# EAGLE board Spring12_6_Node (EAGLE 6.1)
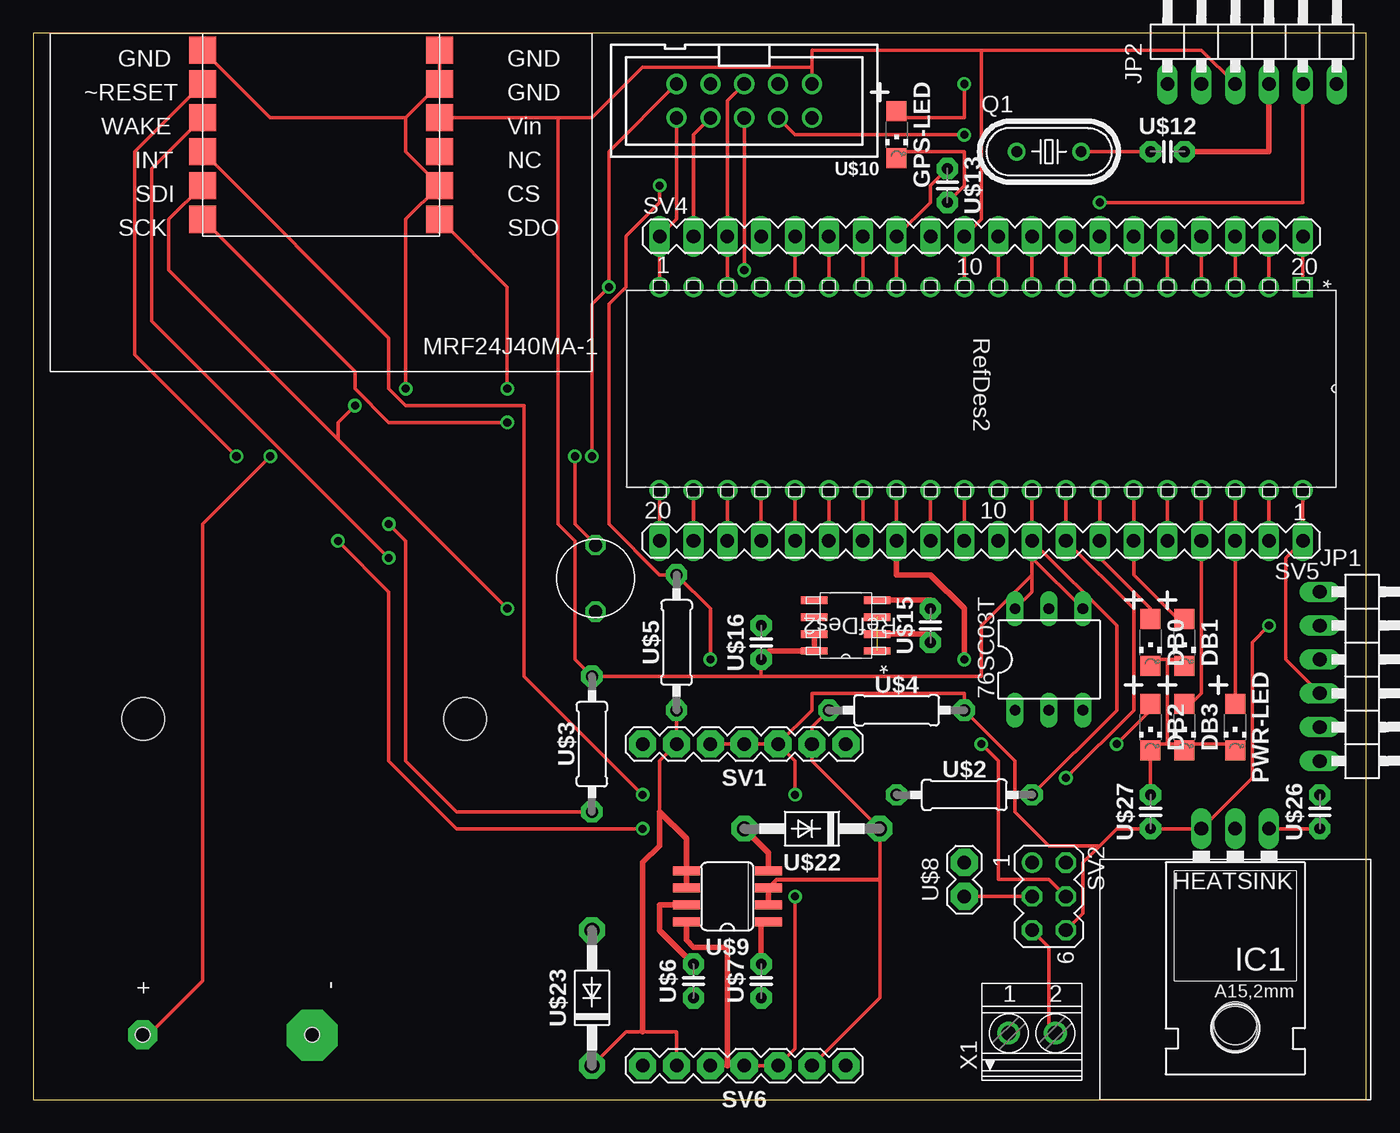
[diagram p0: board, top side]
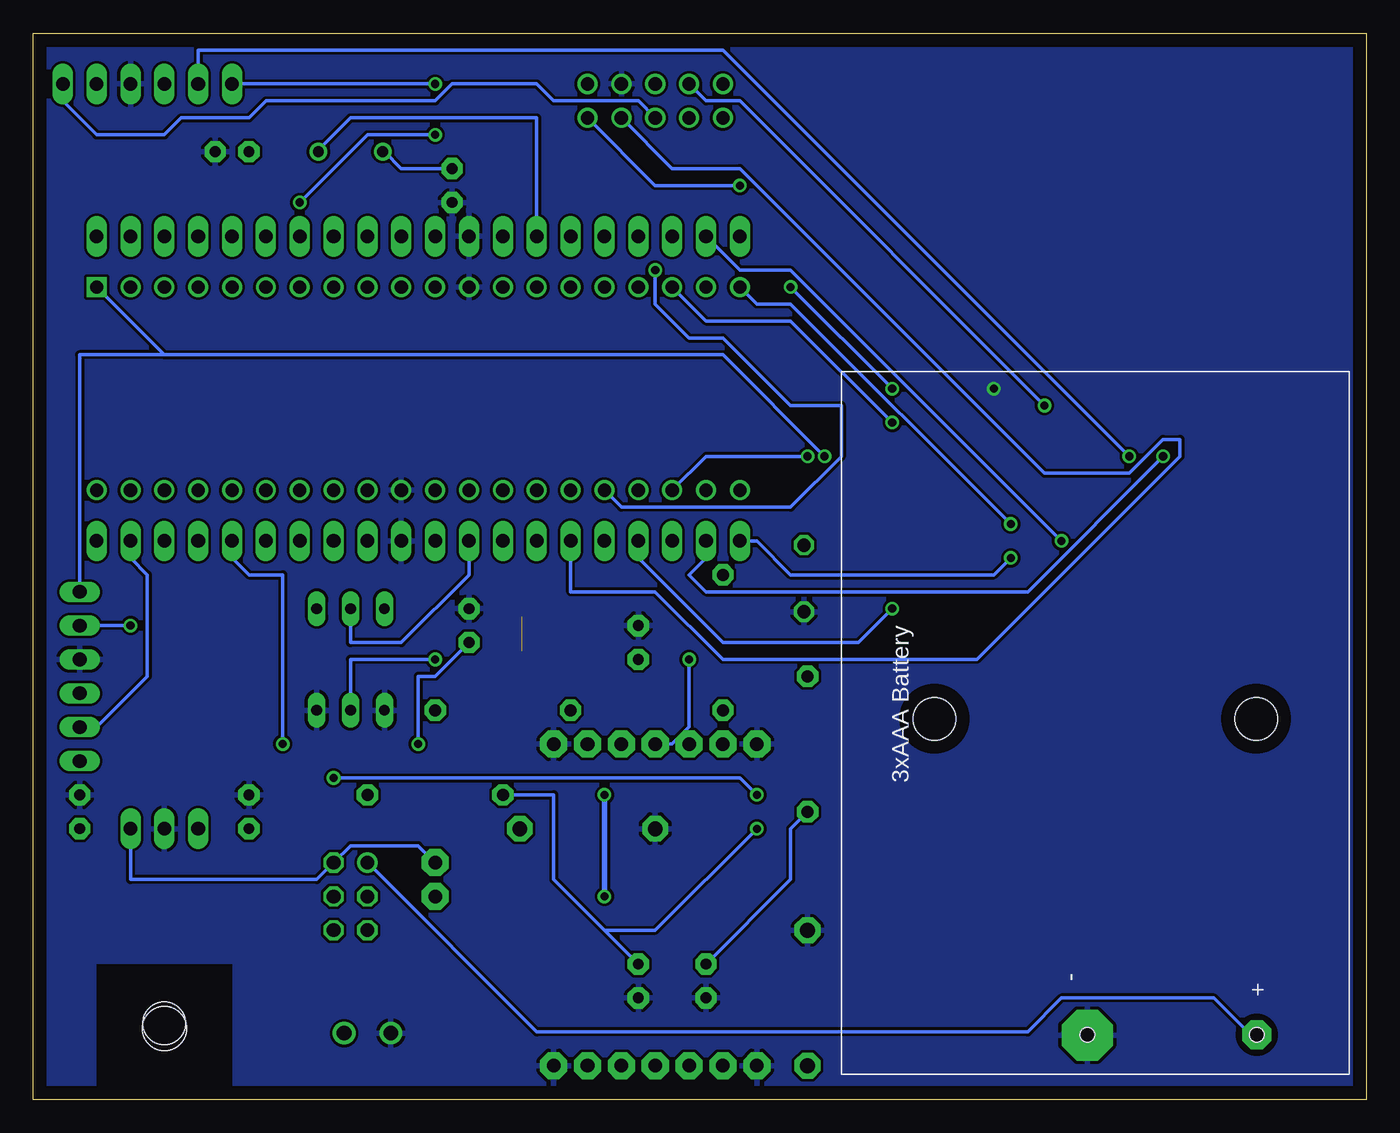
[diagram p1: board, bottom side, seen from below]

Size 100 x 80 mm. Coordinates in mm from the lower left corner, seen from the top.
Outline: 0,0 100,0 100,80 0,80 0,0
Copper layers (1*16): Top 0.035mm / dielectric 1.5mm / Bottom 0.035mm
Design rules: minimum track width 10mil, minimum drill 24mil, track to track 8mil, track to pad 8mil, pad to pad 8mil, via to via 8mil, smd to smd 8mil, copper to edge 40mil, drill to drill 8mil, minimum pad ring 10mil, minimum via ring 8mil, stop-mask expansion 4mil, vias tented up to drill 0mil, thermal gap 10mil
tRestrict: area 17.8,76.2 to 25.4,80; area 44.5,47 to 97.8,59.7; area 80,0 to 100.3,17.8; area 50.8,12.7 to 53.3,17.8; area 74.9,68.6 to 77.5,73.7; area 59.7,33 to 62.2,38.1; area 72.4,30.5 to 80,35.6
bRestrict: area 85.1,1.3 to 95.2,10.2
vRestrict: area 1.3,54.6 to 41.9,80; area 39.4,36.8 to 44.5,41.9; area 47,30.5 to 49.5,38.1; area 40.6,22.9 to 43.2,30.5; area 40.6,3.8 to 43.2,11.4; area 54.6,19.1 to 62.2,21.6; area 66,21.6 to 73.7,24.1; area 61,27.9 to 68.6,30.5; area 43.2,71.1 to 63.5,78.7; area 82.6,26.7 to 87.6,29.2; area 82.6,33 to 87.6,35.6; area 88.9,26.7 to 91.4,29.2

## Footprints (pad centres in the part's own frame; a part is rotated, then mirrored left to right if it is on the bottom)
DIL06 = drill 0.813 long: 1 -2.54,-3.81; 2 0,-3.81; 3 2.54,-3.81; 4 2.54,3.81; 5 0,3.81; 6 -2.54,3.81
LED1206 = smd 1.5 x 1.5: A 0,-1.75; C 0,1.75
78XXL = drill 1.016 long: GND 0,-3.81; IN -2.54,-3.81; OUT 2.54,-3.81 | hole 3.302: 0,11.176
1X06/90 = drill 1.016 long: 1 -6.35,-3.81; 2 -3.81,-3.81; 3 -1.27,-3.81; 4 1.27,-3.81; 5 3.81,-3.81; 6 6.35,-3.81
HC49U-V = drill 0.813: 1 -2.413,0; 2 2.413,0
MA07-1 = drill 1.016 pad 2.032 octagon: 1 -7.62,0; 2 -5.08,0; 3 -2.54,0; 4 0,0; 5 2.54,0; 6 5.08,0; 7 7.62,0
MA03-2 = drill 1.016: 1 -2.54,-1.27 | drill 1.016 octagon: 2 -2.54,1.27; 3 0,-1.27; 4 0,1.27; 5 2.54,-1.27; 6 2.54,1.27
MA20-1 = drill 1.016 long: 1 -24.13,0; 2 -21.59,0; 3 -19.05,0; 4 -16.51,0; 5 -13.97,0; 6 -11.43,0; 7 -8.89,0; 8 -6.35,0; 9 -3.81,0; 10 -1.27,0; 11 1.27,0; 12 3.81,0; 13 6.35,0; 14 8.89,0; 15 11.43,0; 16 13.97,0; 17 16.51,0; 18 19.05,0; 19 21.59,0; 20 24.13,0
PDIP40_600MC = drill 0.991 square: 1 -15.24,48.26 | drill 0.991: 2 -15.24,45.72; 3 -15.24,43.18; 4 -15.24,40.64; 5 -15.24,38.1; 6 -15.24,35.56; 7 -15.24,33.02; 8 -15.24,30.48; 9 -15.24,27.94; 10 -15.24,25.4; 11 -15.24,22.86; 12 -15.24,20.32; 13 -15.24,17.78; 14 -15.24,15.24; 15 -15.24,12.7; 16 -15.24,10.16; 17 -15.24,7.62; 18 -15.24,5.08; 19 -15.24,2.54; 20 -15.24,0; 21 0,0; 22 0,2.54; 23 0,5.08; 24 0,7.62; 25 0,10.16; 26 0,12.7; 27 0,15.24; 28 0,17.78; 29 0,20.32; 30 0,22.86; 31 0,25.4; 32 0,27.94; 33 0,30.48; 34 0,33.02; 35 0,35.56; 36 0,38.1; 37 0,40.64; 38 0,43.18; 39 0,45.72; 40 0,48.26
R-1/4W = drill 0.9 pad 1.6 octagon: 1 -5.08,0; 2 5.08,0
C2.5-5 = drill 0.813 pad 1.6 octagon: 1 -1.27,0; 2 1.27,0
MA02-1 = drill 1.016 pad 2.032 octagon: 1 -1.27,0; 2 1.27,0
SO08 = smd 0.66 x 2.032: 1 -1.905,-3.073; 2 -0.635,-3.073; 3 0.635,-3.073; 4 1.905,-3.073; 5 1.905,3.073; 6 0.635,3.073; 7 -0.635,3.073; 8 -1.905,3.073
2510-6002 = drill 1 pad 1.422: 1 -5.08,-1.27; 2 -5.08,1.27; 3 -2.54,-1.27; 4 -2.54,1.27; 5 0,-1.27; 6 0,1.27; 7 2.54,-1.27; 8 2.54,1.27; 9 5.08,-1.27; 10 5.08,1.27
PCB12 = smd 2.032 x 2.032: 1 -8.89,8.89; 2 -8.89,6.35; 3 -8.89,3.81; 4 -8.89,1.27; 5 -8.89,-1.27; 6 -8.89,-3.81; 7 8.89,-3.81; 8 8.89,-1.27; 9 8.89,1.27; 10 8.89,3.81; 11 8.89,6.35; 12 8.89,8.89
SOIC8-N_MC = smd 1.981 x 0.559: 1 -2.362,1.905; 2 -2.362,0.635; 3 -2.362,-0.635; 4 -2.362,-1.905; 5 2.362,-1.905; 6 2.362,-0.635; 7 2.362,0.635; 8 2.362,1.905
2479-BATTERY = drill 1.1 pad 3.81 octagon: P$1 24.384,-7.01 | drill 1.1 pad 2.184 octagon: P$2 24.359,-19.736 | hole 3.2: 0.635,-19.685; 0.635,4.445 | hole 1.1: 24.359,-7.01; 24.359,-19.736
1N5817 = drill 1.118 pad 1.93 octagon: A 5.08,0; C -5.08,0
EVQ-11U05R = drill 1 octagon: P$1 -1,3.5; P$2 -1,-1.5
7-361-BA = hole 3.2: -2.54,-3.175
1751248 = drill 1.1 pad 1.7: 1 -1.75,-0.1; 2 1.75,-0.1

## Placement (x,y rotation side)
76SC03T  I2C Select  [DIL06]  76.2,33.02 0 top
DB0  LED-SMD-1206  [LED1206]  83.82,34.29 180 top
DB1  LED-SMD-1206  [LED1206]  86.36,34.29 180 top
DB2  LED-SMD-1206  [LED1206]  83.82,27.94 180 top
DB3  LED-SMD-1206  [LED1206]  86.36,27.94 180 top
GPS-LED  LED-SMD-1206  [LED1206]  64.77,72.39 180 top
IC1  L78S05CV  [78XXL]  90.17,16.51 180 top
JP1  PICKIT  [1X06/90]  100.33,31.75 270 top
JP2  GPSR  [1X06/90]  91.44,80.01 0 top
PWR-LED  LED-SMD-1206  [LED1206]  90.17,27.94 180 top
Q1  20MHz  [HC49U-V]  76.2,71.12 0 top
SV1  I2C BUS  [MA07-1]  53.34,26.67 180 top
SV2  PWR CNTL  [MA03-2]  76.2,15.24 270 top
SV4  [MA20-1]  71.12,64.77 0 top
SV5  [MA20-1]  71.12,41.91 180 top
SV6  I2C BUS  [MA07-1]  53.34,2.54 180 top
U$1  PIC18F45J10-X/P  [PDIP40_600MC]  46.99,45.72 270 top
U$2  1k  [R-1/4W]  69.85,22.86 0 top
U$3  1k  [R-1/4W]  41.91,26.67 90 top
U$4  330  [R-1/4W]  64.77,29.21 0 top
U$5  330  [R-1/4W]  48.26,34.29 90 top
U$6  100pF  [C2.5-5]  49.53,8.89 90 top
U$7  100pF  [C2.5-5]  54.61,8.89 90 top
U$8  CURRENT  [MA02-1]  69.85,16.51 90 top
U$9  PCA9600SO8  [SO08]  52.07,15.24 90 top
U$10  DEBUG  [2510-6002]  53.34,74.93 180 top
U$11  MRF24J40MA  [PCB12]  21.59,69.85 0 top
U$12  18pF  [C2.5-5]  85.09,71.12 0 top
U$13  18pF  [C2.5-5]  68.58,68.58 270 top
U$14  MCP1725-XXXXX/SN  [SOIC8-N_MC]  60.96,35.56 180 top
U$15  10uF  [C2.5-5]  67.31,35.56 90 top
U$16  10uF  [C2.5-5]  54.61,34.29 90 top
U$17  2479-BATTERY  [2479-BATTERY]  27.94,29.21 270 top
U$22  1N5817P  [1N5817]  58.42,20.32 180 top
U$23  1N5817P  [1N5817]  41.91,7.62 90 top
U$25  EVQ-11U05R  [EVQ-11U05R]  43.18,38.1 0 top
U$26  0.33uF  [C2.5-5]  96.52,21.59 90 top
U$27  0.1uF  [C2.5-5]  83.82,21.59 90 top
U$28  7-361-BA  [7-361-BA]  87.63,2.54 180 top
X1  1751248  [1751248]  74.93,5.08 0 top

## Library data of the parts
76SC03T = ic-package
DB0 DB1-DB3 GPS-LED PWR-LED SV1 SV6 U$2-U$10 U$12 U$15 U$16 U$22 U$23 U$26 U$27 = 4534_I2C2
IC1 = v-reg
JP1 JP2 = pinhead
Q1 = crystal; DIGIKEY: XC1723-ND; OC_FARNELL: 1666969; OC_NEWARK: unknown
SV2 SV4 SV5 = con-lstb; OC_FARNELL: unknown; OC_NEWARK: unknown
U$1 U$11 U$17 U$25 U$28 = 4534_Node_Board
U$13 = 4534_I2C2; DIGIKEY: 490-3632-ND
U$14 = 4534_Node_Board; NEWARK: MCP1725-3002E/SN
X1 = con-phoenix-350; OC_FARNELL: unknown; OC_NEWARK: unknown

## Nets
3V3: 76SC03T.4 76SC03T.6 JP2.3 SV4.10 SV5.9 U$1.11 U$1.32 U$2.2 U$3.2 U$10.1 U$11.10 U$14.7 U$14.8 U$16.1
3V3-REG: SV2.4 U$14.1 U$14.2 U$14.3 U$15.1
5V: IC1.OUT JP1.2 SV1.3 SV1.4 SV1.5 SV2.6 SV6.3 SV6.4 SV6.5 U$4.2 U$5.2 U$9.8 U$10.2 U$27.1
BATTERY: JP2.2 SV2.1 U$17.P$2
CURRENT: SV2.3 U$8.1
DB-LED0: DB0.A SV5.7 U$1.34
DB-LED1: DB1.A SV5.6 U$1.35
DB-LED2: DB2.A SV5.5 U$1.36
DB-LED3: DB3.A SV5.4 U$1.37
EXTERNAL: SV2.5 X1.2
GPS-LED: GPS-LED.A JP2.1
I2C-ADDR0: 76SC03T.2 SV5.13 U$1.28
I2C-ADDR1: 76SC03T.5 SV5.12 U$1.29
I2C-ADDR2: SV5.11 U$1.30
MRF-INT: SV5.8 U$1.33 U$11.4
MRF-RESET: SV5.19 U$1.22 U$11.2
MRF-WAKE: SV5.20 U$1.21 U$11.3
N$1: SV4.13 U$1.8
N$2: SV4.6 U$1.15
N$3: SV4.5 U$1.16
N$8: SV5.14 U$1.27
N$13: SV4.19 U$1.2
N$14: SV4.18 U$1.3
N$15: SV4.17 U$1.4
N$16: SV4.16 U$1.5
N$17: SV4.15 U$1.6
N$18: SV4.14 U$1.7
N$20: SV4.12 U$1.9
N$21: SV4.11 U$1.10
N$26: SV4.4
OSC1: Q1.1 SV4.8 U$1.13 U$13.1
OSC2: Q1.2 SV4.7 U$1.14 U$12.1
PGC: JP1.5 SV5.2 U$1.39
PGD: JP1.4 SV5.1 U$1.40
PIC-RESET: JP1.1 SV4.20 U$1.1 U$25.P$1
PICKIT-AUX: JP1.6
PWR-LED: PWR-LED.A SV5.3 U$1.38
REGULATORS: IC1.IN SV2.2 U$8.2 U$26.1
SCL-BUS: SV1.2 SV6.2 U$4.1 U$9.2 U$9.3 U$22.C
SCL-LOCAL: SV4.2 U$2.1 U$7.2 U$9.1 U$10.8
SDA-BUS: SV1.6 SV6.6 U$5.1 U$9.5 U$9.6 U$23.C
SDA-LOCAL: SV4.1 U$1.20 U$3.1 U$6.2 U$9.7 U$10.10
SPI-MISO: SV5.18 U$1.23 U$10.9 U$11.7
SPI-MOSI: SV5.17 U$1.24 U$10.7 U$11.5
SPI-SCK: SV4.3 U$1.18 U$10.5 U$11.6
UART-RX: JP2.5 SV5.15 U$1.26 U$10.4
UART-TX: JP2.6 SV5.16 U$1.25 U$10.6
VSS: 76SC03T.1 76SC03T.3 DB0.C DB1.C DB2.C DB3.C GPS-LED.C IC1.GND JP1.3 JP2.4 PWR-LED.C SV1.1 SV1.7 SV4.9 SV5.10 SV6.1 SV6.7 U$1.12 U$1.31 U$6.1 U$7.1 U$9.4 U$10.3 U$11.1 U$11.8 U$11.11 U$11.12 U$12.2 U$13.2 U$14.4 U$15.2 U$16.2 U$17.P$1 U$22.A U$23.A U$25.P$2 U$26.2 U$27.2 X1.1

## Tracks (layer width: path | path; a pad name or v marks a point on that pad's centre or on a via)
3V3
  Top 0.254: 54.61,31.75 U$3.2 40.64,33.02 40.64,41.91 39.37,43.18 39.37,73.66 | U$16.1 54.61,31.75 | 76SC03T.6 74.93,38.1 74.93,39.37 | 74.93,40.64 74.93,39.37 | 74.93,40.64 76SC03T.4 | 74.93,40.64 SV5.9 | SV5.9 U$1.32 | U$2.2 81.28,29.21 81.28,35.56 SV5.9 | 54.61,31.75 71.12,31.75 71.12,35.56 74.93,39.37 | U$1.11 SV4.10 71.12,66.04 71.12,78.74 | 39.37,73.66 41.91,73.66 45.72,77.47 58.42,77.47 | 39.37,73.66 U$11.10 | U$10.1 58.42,77.47 | JP2.3 87.63,78.74 71.12,78.74 | 71.12,78.74 58.42,78.74 58.42,77.47
  Top 0.406: U$14.7 U$14.8 55.24,33.66 U$16.1
3V3-REG  (via drill 0.61)  (2 unrouted)
  Top 0.254: SV2.4 76.2,16.51 72.39,16.51 72.39,25.4 v71.12,26.67
  Top 0.406: U$14.2 67.31,34.92 U$15.1
  Bottom 0.254: v71.12,26.67 71.12,31.75 69.85,31.75 U$15.1
5V  (via drill 0.6, 0.61)
  Top 0.254: v46.99,68.58 46.99,67.31 44.45,64.77 44.45,60.96 43.18,59.69 43.18,43.18 46.99,39.37 U$5.2 50.8,36.83 v50.8,33.02 | SV6.5 52.07,2.54 SV6.4 SV6.3 57.15,3.81 v57.15,15.24 | SV1.5 SV1.4 SV1.3 | v57.15,22.86 57.15,25.4 SV1.3 | SV2.6 78.74,13.97 78.74,17.78 80.01,19.05 | 80.01,19.05 81.28,20.32 U$27.1 IC1.OUT 91.44,24.13 91.44,34.29 v92.71,35.56 | 80.01,19.05 76.2,19.05 73.66,21.59 73.66,25.4 U$4.2 69.85,30.48 58.42,30.48 58.42,29.21 SV1.3
  Top 0.406: U$9.8 49,11.96 49.53,11.43 52.07,11.43 52.07,2.54
  Bottom 0.254: U$10.2 53.34,68.58 v46.99,68.58 | v92.71,35.56 JP1.2 | v50.8,33.02 50.8,27.94 52.07,26.67 SV1.4
  Bottom 0.406: v57.15,22.86 v57.15,15.24
BATTERY  (via drill 0.61)
  Top 0.254: v17.78,48.26 12.7,43.18 12.7,8.89 8.89,5.08 U$17.P$2
  Bottom 0.254: SV2.1 62.23,5.08 25.4,5.08 22.86,7.62 11.43,7.62 8.89,5.08 U$17.P$2 | JP2.2 87.63,78.74 48.26,78.74 v17.78,48.26
CURRENT
  Top 0.254: U$8.1 SV2.3
DB-LED0
  Top 0.254: U$1.34 SV5.7 80.01,40.64 83.82,36.83 DB0.A 83.82,35.56
DB-LED1
  Top 0.254: U$1.35 SV5.6 82.55,39.37 86.36,35.56 DB1.A
DB-LED2  (via drill 0.61)
  Top 0.254: SV5.5 U$1.36 | v81.28,26.67 83.82,29.21 DB2.A
  Bottom 0.254: v81.28,26.67 81.28,39.37 83.82,39.37 85.09,40.64 SV5.5
DB-LED3
  Top 0.254: U$1.37 SV5.4 87.63,30.48 86.36,29.21 DB3.A
EXTERNAL
  Top 0.254: SV2.5 76.2,11.43 76.2,5.08 X1.2
GPS-LED  (via drill 0.61)
  Top 0.254: v69.85,76.2 69.85,73.66 64.77,73.66 GPS-LED.A
  Bottom 0.254: JP2.1 v69.85,76.2
I2C-ADDR0  (via drill 0.61)
  Top 0.254: SV5.13 U$1.28
  Top 0.406: v69.85,33.02 69.85,36.83 67.31,39.37 64.77,39.37 SV5.13
  Bottom 0.254: 76SC03T.2 76.2,33.02 v69.85,33.02
I2C-ADDR1
  Top 0.254: SV5.12 U$1.29
  Bottom 0.254: 76SC03T.5 76.2,34.29 72.39,34.29 67.31,39.37 SV5.12
I2C-ADDR2
  Top 0.254: SV5.11 U$1.30
MRF-INT  (via drill 0.61)
  Top 0.254: U$11.4 26.67,57.15 26.67,53.34 27.94,52.07 36.83,52.07 36.83,31.75 v45.72,22.86 | v77.47,24.13 82.55,29.21 82.55,36.83 SV5.8 U$1.33
  Bottom 0.254: v45.72,22.86 46.99,24.13 v77.47,24.13
MRF-RESET  (via drill 0.61)
  Top 0.254: U$11.2 7.62,71.12 7.62,55.88 v15.24,48.26 | SV5.19 U$1.22
  Bottom 0.254: v15.24,48.26 25.4,38.1 49.53,38.1 50.8,39.37 49.53,40.64 SV5.19
MRF-WAKE  (via drill 0.61)
  Top 0.254: U$11.3 8.89,69.85 8.89,58.42 v26.67,40.64 | SV5.20 U$1.21
  Bottom 0.254: v26.67,40.64 27.94,39.37 43.18,39.37 45.72,41.91 SV5.20
N$1
  Top 0.254: SV4.13 U$1.8
N$2
  Top 0.254: SV4.6 U$1.15
N$3
  Top 0.254: SV4.5 U$1.16
N$8
  Top 0.254: SV5.14 U$1.27
N$13
  Top 0.254: SV4.19 U$1.2
N$14
  Top 0.254: SV4.18 U$1.3
N$15
  Top 0.254: SV4.17 U$1.4
N$16
  Top 0.254: SV4.16 U$1.5
N$17
  Top 0.254: SV4.15 U$1.6
N$18
  Top 0.254: SV4.14 U$1.7
N$20
  Top 0.254: SV4.12 U$1.9
N$21
  Top 0.254: SV4.11 U$1.10
OSC1
  Top 0.254: U$1.13 SV4.8 67.31,67.31 67.31,68.58 U$13.1
  Bottom 0.254: U$13.1 72.39,69.85 73.66,71.12 Q1.1
OSC2
  Top 0.254: SV4.7 U$1.14 | U$12.1 Q1.2
  Bottom 0.254: SV4.7 62.23,73.66 76.2,73.66 78.74,71.12 Q1.2
PGC
  Top 0.254: SV5.2 U$1.39
  Bottom 0.254: JP1.5 95.25,27.94 91.44,31.75 91.44,39.37 92.71,40.64 SV5.2
PGD
  Top 0.254: U$1.40 SV5.1 93.98,40.64 93.98,33.02 JP1.4
PIC-RESET  (via drill 0.61)
  Top 0.254: SV4.20 U$1.1 | v40.64,48.26 40.64,43.18 41.91,41.91 U$25.P$1
  Bottom 0.254: v40.64,48.26 48.26,55.88 90.17,55.88 | U$1.1 90.17,55.88 | JP1.1 96.52,55.88 90.17,55.88
PWR-LED
  Top 0.254: U$1.38 SV5.3 PWR-LED.A 90.17,29.21
REGULATORS
  Top 0.254: U$26.1 IC1.IN
  Bottom 0.254: U$8.2 71.12,19.05 76.2,19.05 SV2.2 78.74,16.51 92.71,16.51 IC1.IN
SCL-BUS
  Top 0.254: U$4.1 58.42,27.94 SV1.2 58.42,25.4 U$22.C 63.5,16.51 63.5,7.62 SV6.2
  Top 0.305: U$9.3 55.78,16.51 63.5,16.51
  Top 0.406: U$9.2 U$9.3
SCL-LOCAL  (via drill 0.61)
  Top 0.254: U$10.8 49.53,72.39 SV4.2 | v22.86,41.91 26.67,38.1 26.67,25.4 31.75,20.32 v45.72,20.32
  Top 0.406: U$9.1 54.61,13.34 U$7.2
  Bottom 0.254: 57.15,12.7 60.96,16.51 60.96,22.86 U$2.1 | 57.15,12.7 U$7.2 | SV4.2 46.99,62.23 43.18,62.23 v22.86,41.91 | v45.72,20.32 53.34,12.7 57.15,12.7
SDA-BUS
  Top 0.254: U$5.1 SV1.6 46.99,25.4 46.99,21.59 | U$23.C 44.45,5.08 45.72,5.08 48.26,5.08 SV6.6
  Top 0.406: U$9.6 U$9.5 49,19.58 46.99,21.59 46.99,19.05 45.72,17.78 45.72,5.08
SDA-LOCAL  (via drill 0.61)
  Top 0.254: U$1.20 SV4.1 48.26,66.04 U$10.10 | v26.67,43.18 27.94,41.91 27.94,25.4 31.75,21.59 U$3.1
  Top 0.406: U$9.7 46.99,14.61 46.99,12.7 U$6.2
  Bottom 0.254: U$6.2 43.18,16.51 43.18,20.32 U$3.1 | U$1.20 45.72,59.69 43.18,59.69 v26.67,43.18
SPI-MISO  (via drill 0.61)
  Top 0.254: SV5.18 U$1.23 | U$11.7 35.56,60.96 v35.56,53.34 | U$10.9 43.18,71.12 v43.18,60.96 41.91,59.69 v41.91,48.26
  Bottom 0.254: v43.18,60.96 v35.56,53.34 | U$1.23 49.53,48.26 v41.91,48.26
SPI-MOSI  (via drill 0.61)
  Top 0.254: U$11.5 10.16,66.04 10.16,62.23 22.86,49.53 | v35.56,36.83 22.86,49.53 | SV5.17 U$1.24 | v24.13,52.07 22.86,50.8 22.86,49.53
  Bottom 0.254: v35.56,36.83 38.1,34.29 48.26,34.29 54.61,40.64 SV5.17 | U$10.7 49.53,74.93 46.99,74.93 v24.13,52.07
SPI-SCK  (via drill 0.61)
  Top 0.254: U$10.5 52.07,74.93 SV4.3 U$1.18 | U$11.6 24.13,54.61 24.13,53.34 26.67,50.8 v35.56,50.8
  Bottom 0.254: v35.56,50.8 43.18,58.42 49.53,58.42 U$1.18
UART-RX  (via drill 0.61)
  Top 0.254: SV5.15 U$1.26 | U$10.4 57.15,72.39 v69.85,72.39 | v80.01,67.31 95.25,67.31 JP2.5
  Bottom 0.254: v69.85,72.39 74.93,72.39 v80.01,67.31 | SV5.15 59.69,38.1 53.34,38.1 48.26,33.02 29.21,33.02 13.97,48.26 13.97,49.53 15.24,49.53 17.78,46.99 24.13,46.99 46.99,69.85 52.07,69.85 U$10.4
UART-TX  (via drill 0.61)
  Top 0.254: SV5.16 U$1.25 | U$10.6 v53.34,62.23
  Bottom 0.254: U$10.6 54.61,74.93 60.96,74.93 62.23,76.2 68.58,76.2 69.85,74.93 82.55,74.93 83.82,73.66 88.9,73.66 90.17,72.39 95.25,72.39 97.79,74.93 JP2.6 | U$1.25 55.88,44.45 43.18,44.45 39.37,48.26 39.37,52.07 43.18,52.07 48.26,57.15 50.8,57.15 53.34,59.69 v53.34,62.23
VSS  (via drill 0.61)
  Top 0.254: 27.94,73.66 27.94,71.12 U$11.8 27.94,66.04 v27.94,53.34 | 27.94,73.66 U$11.11 U$11.12 | U$11.1 17.78,73.66 27.94,73.66 | U$13.2 69.85,68.58 69.85,71.12 64.77,71.12 GPS-LED.C | 85.09,33.02 86.36,33.02 DB1.C | 85.09,33.02 83.82,33.02 DB0.C | 86.36,26.67 85.09,26.67 | 85.09,26.67 83.82,26.67 DB2.C U$27.2 | 86.36,26.67 90.17,26.67 PWR-LED.C | 86.36,26.67 DB3.C | 85.09,26.67 85.09,33.02
  Top 0.406: U$9.4 55.14,18.52 U$22.A | JP2.4 92.71,71.12 U$12.2 | U$14.4 67.31,37.47 U$15.2
  pour Bottom: 0,80.01 100.33,80.01 100.33,0 0,0